# Altium PCB PCB1.PcbDoc
Units mil, origin at the board's own origin, x right, y up, seen from the top; angles counter-clockwise.
Board outline 2550 x 3100 mil, 2 copper layers (Top Layer, Bottom Layer), stack 167.2 mil thick; 31 components, 21 nets, 101 pads, 3 vias.
Unrouted connection lines stored in the file: 2.
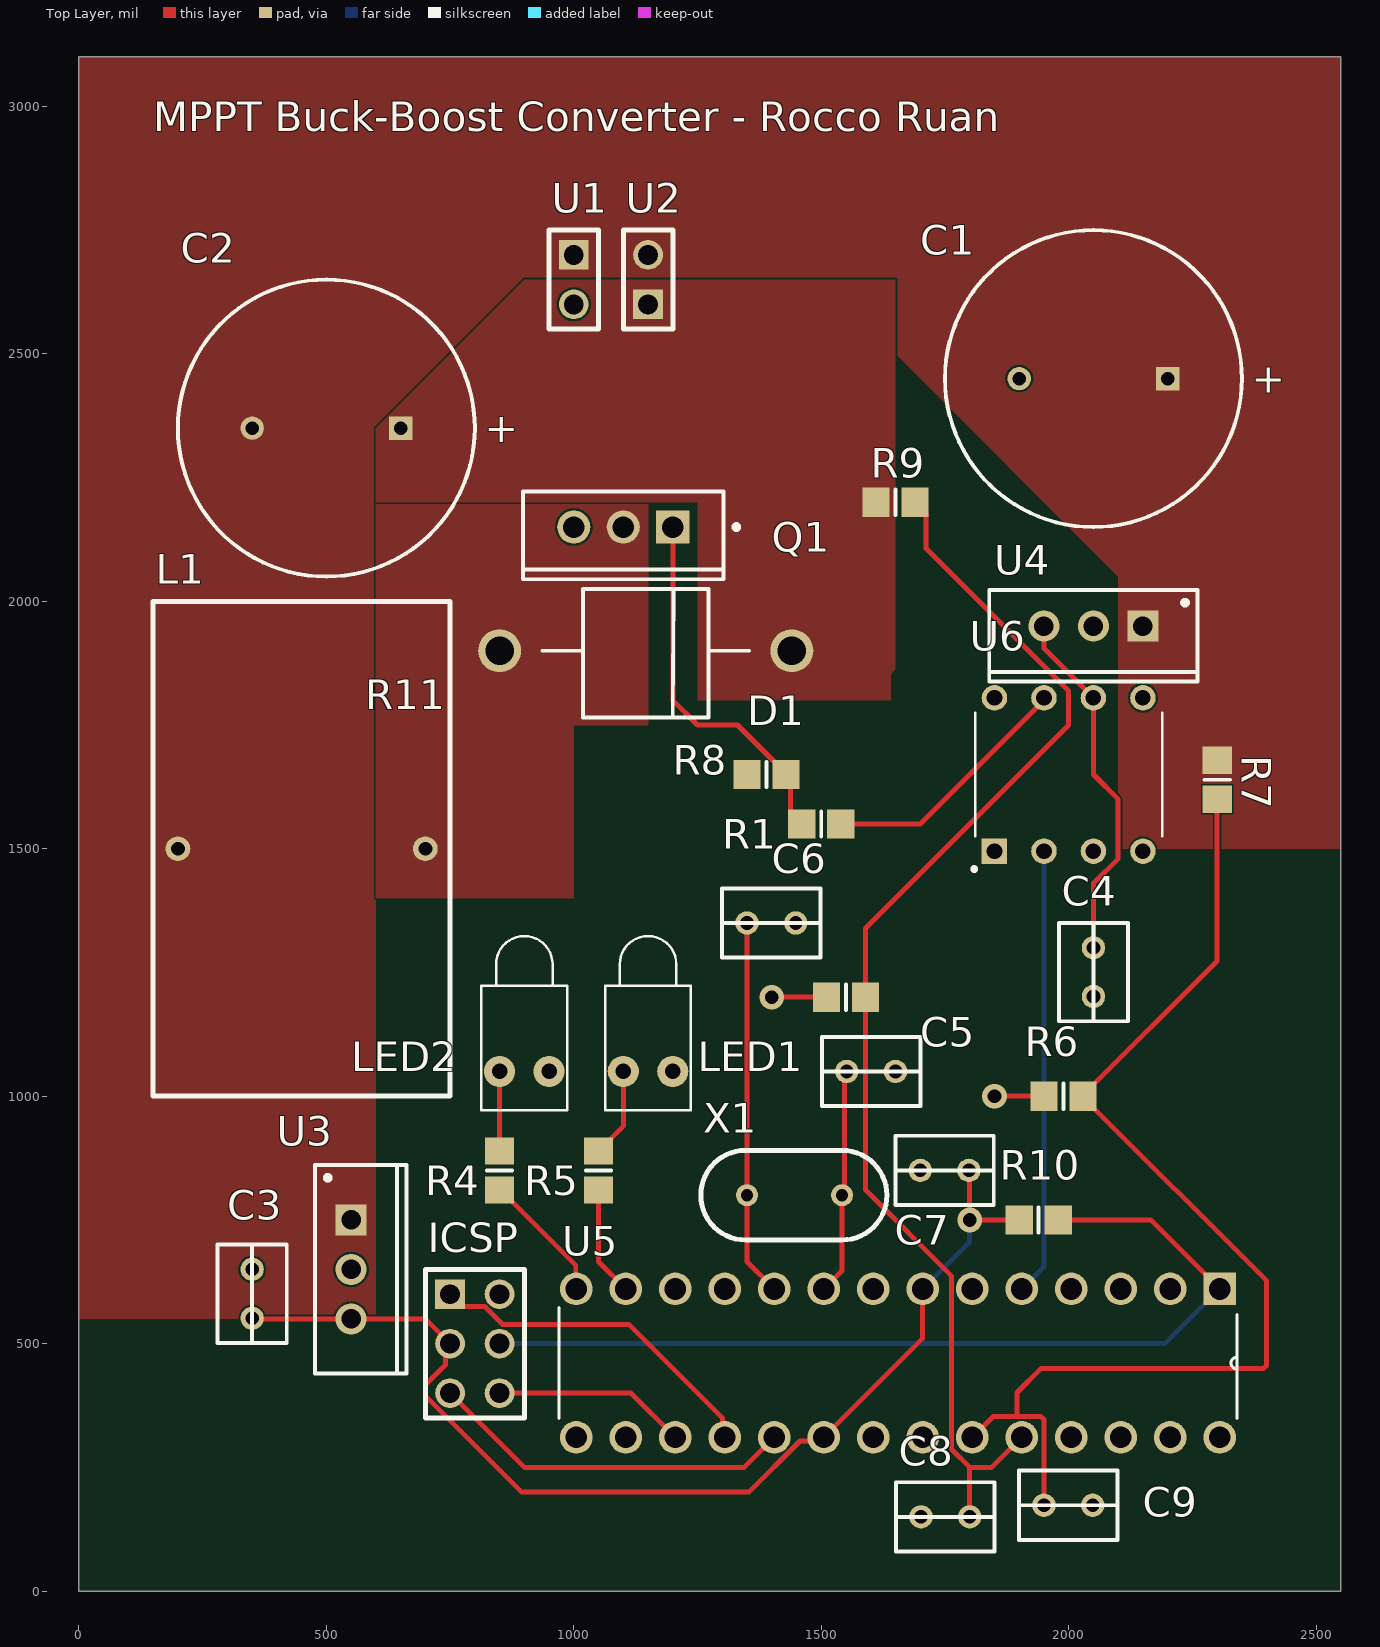
[diagram p0: Top Layer view]
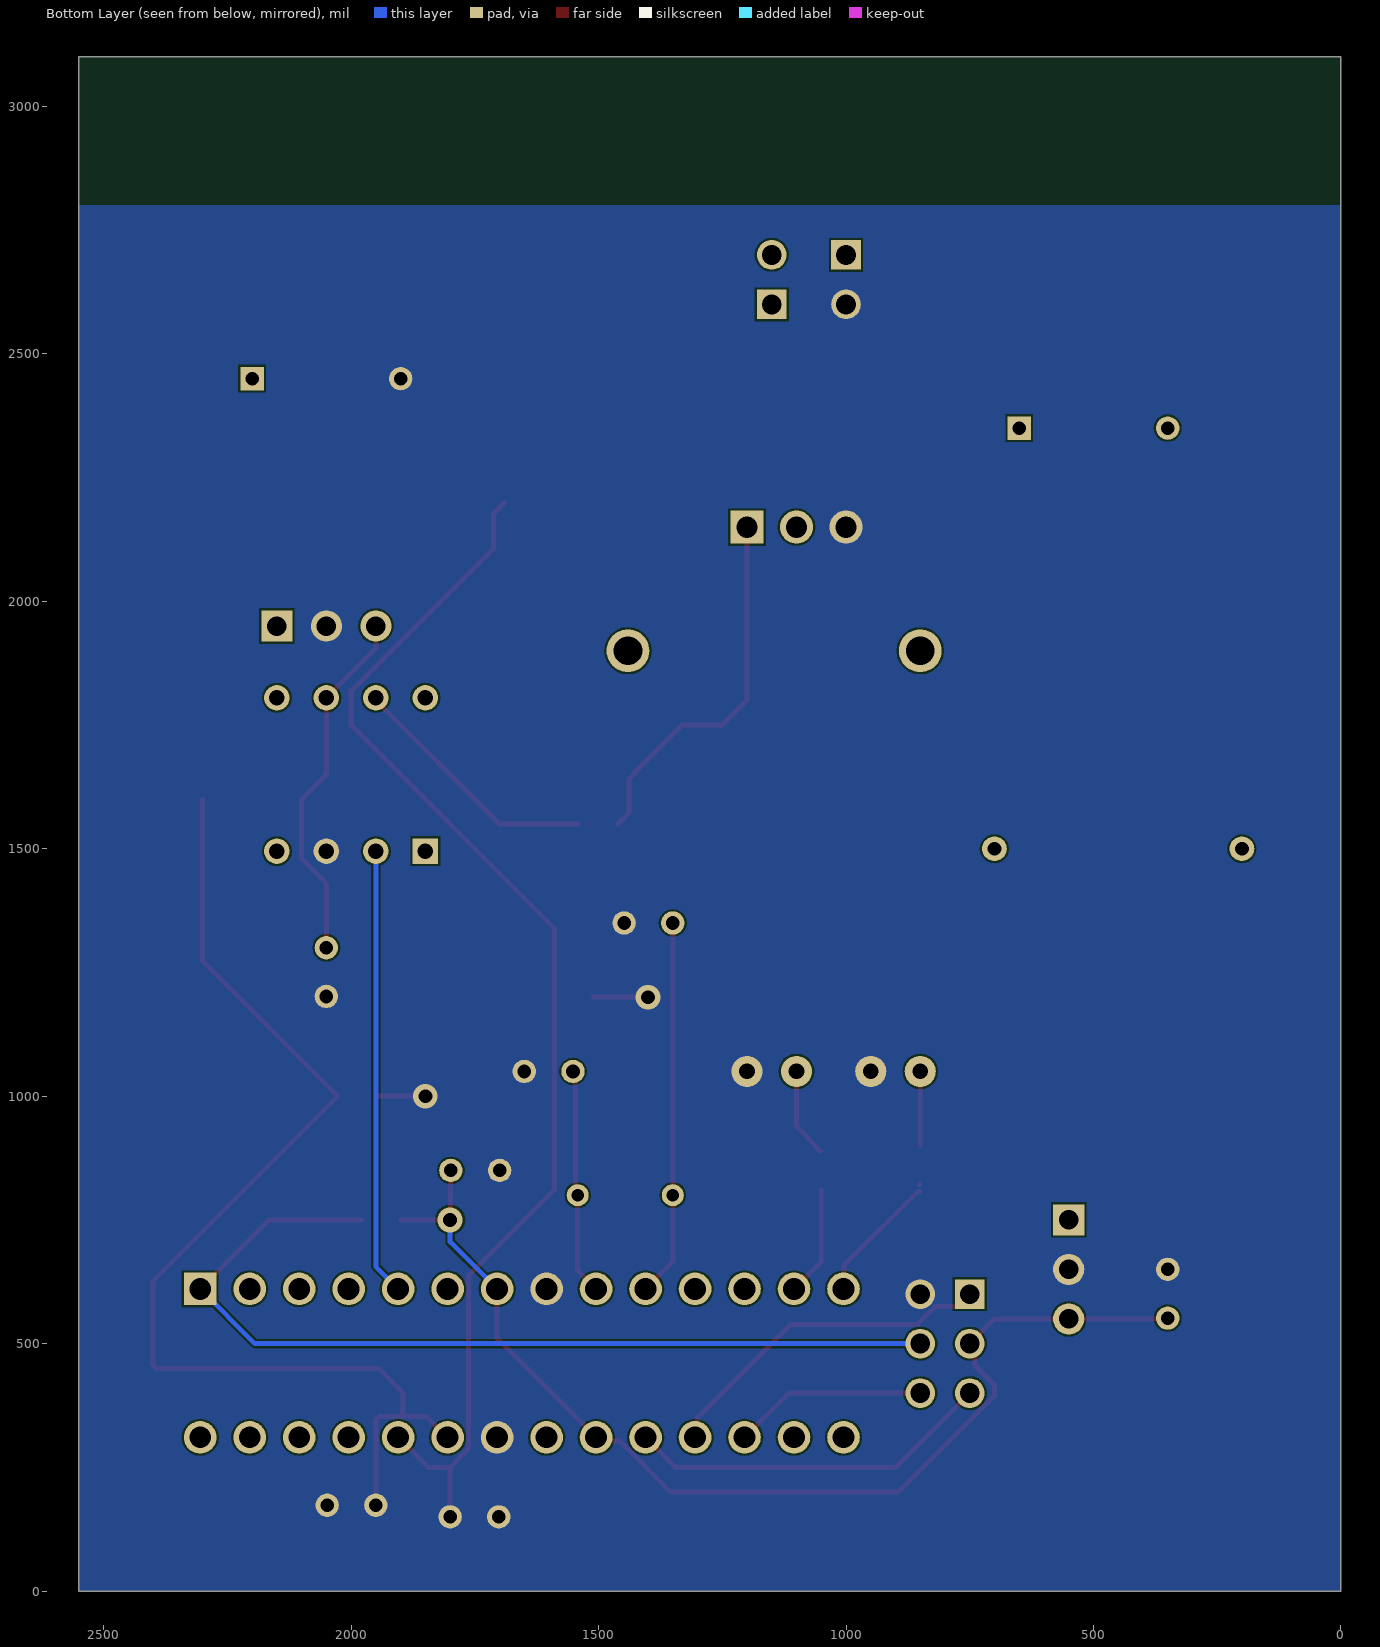
[diagram p1: Bottom Layer view, seen from below]

## Layer stack, top to bottom
Top Solder: solder mask 0.4, Solder Resist, Dk 3.5
Top Layer: signal copper 1.4
Dielectric 1: dielectric 164.4, FR-4, Dk 4.8
Bottom Layer: signal copper 1.4
Bottom Solder: solder mask 0.4, Solder Resist, Dk 3.5

## Board outline
0,0 2550,0 2550,3100 0,3100

## Design rules (kind name [scope] priority, off if disabled: settings)
Clearance [All] p1: gap=4 ignorepadtopadclearanceinfootprint=FALSE except(0: Arc-Hole Track-Hole SMDPad-Hole THPad-Hole Via-Hole Fill-Hole Poly-Hole Region-Hole Text-Hole; 5: Arc-Via Track-Via SMDPad-Via THPad-Via Via-Via Via-Fill Via-Poly Via-Region Via-Text)
HoleSize [All] p1: absolutevalues=TRUE maxlimit=100 minlimit=12 maxpercent=80.000 minpercent=20.000
PlaneConnect [All] p1: planeconnectstyle=Direct reliefexpansion=20 reliefentries=4 reliefconductorwidth=10 reliefairgap=10
PolygonConnect [All] p1: connectstyle=Direct reliefconductorwidth=10 reliefentries=4 polygonreliefangle="90 Angle" airgapwidth=10
RoomDefinition Sheet1 [InComponentClass('Sheet1')] p1: confinementstyle=ConfineIn formatcopy=TRUE lockcomponents=FALSE outline 0,0 2550,0 2550,2800 0,2800
RoutingVias [All] p1: holewidth=28 width=50 viastyle="Through Hole" minholewidth=12 minwidth=18 maxholewidth=28 maxwidth=50
SilkToSilkClearance [All] p1: silktosilkclearance=0
SilkToSolderMaskClearance [IsPad] p1: minsilkscreentomaskgap=0 clearancetoexposedcopper=TRUE
SolderMaskExpansion [All] p1: expansion=4
Width [All] p1: maxlimit=10 minlimit=4 preferedwidth=10
26 further rules are at their usual default settings.

## Components (designator, comment, footprint, x,y, rotation, side; value= is the part's Value field where it differs from the comment)
C1 "Cap Pol1" RB7.6-15 2050,2450 r0 top value=470uF
C2 "Cap Pol1" RB7.6-15 500,2350 r0 top value=470uF
C3 "Cap" "Ceramic Capacitor" 350,650 r270 top value=10uF
C4 "Cap" "Ceramic Capacitor" 2050,1201.57 r90 top value=10uF
C5 "Cap" "Ceramic Capacitor" 1650,1050 r180 top value=7pF
C6 "Cap" "Ceramic Capacitor" 1448.43,1350 r180 top value=7pF
C7 "Cap" "Ceramic Capacitor" 1700,850 r0 top value=0.1uF
C8 "Cap" "Ceramic Capacitor" 1701.57,150 r0 top value=0.1uF
C9 "Cap" "Ceramic Capacitor" 2048.43,173.48 r180 top value=0.1uF
D1 "10A10" Diode 850,1900 r0 top
ICSP "ISCPHeader3x2" "3x2 Header" 750,600 r270 top
L1 "Inductor" "Toroidal Inductor" 450,1500 r180 top value=1mH
LED1 "LED-3MM" LED-1 1150,1050 r90 top
LED2 "LED-3MM" LED-1 900,1050 r90 top
Q1 "IRF3710" NXP-SOT226 1100,2150 r270 top
R1 "Res1" 6-0805_M 1500,1550 r180 top value=10k
R4 "Res1" 6-0805_M 850,850 r270 top value=1K
R5 "Res1" 6-0805_M 1050,850 r270 top value=1K
R6 "Res1" 6-0805_M 1989.37,1000 r0 top value=5k
R7 "Res1" 6-0805_M 2300,1639.37 r90 top value=95K
R8 "Res1" 6-0805_M 1550,1200 r0 top value=5k
R9 "Res1" 6-0805_M 1650,2200 r180 top value=95K
R10 "Res1" 6-0805_M 1939.37,750 r180 top value=1K
R11 "100k" 6-0805_M 1389.37,1650 r180 top value=1K
U1 "KF1000-2P" "2x1 HEADER" 1000,2650 r270 top
U2 "KF1000-2P" "2x1 HEADER" 1150,2650 r90 top
U3 "L7805CV-DG" TO-220AB 550,650 r270 top
U4 "L7812CV-DG" TO-220AB 2050,1950 r180 top
U5 "ATMEGA328P-PU" *DIP254P762X457-28 1005,310.63 r270 top
U6 "TC427CPA" *DIP787W46P254L927H533Q8 2000,1650 r90 top
X1 "XTAL" Oscillator 1542.13,800 r180 top

## Footprints (in the part's own frame and the unit in brackets; to place one, negate y for a bottom-side part, rotate by r counter-clockwise, add the part's x,y. Pads: shape width x height; smd on the part's side, far side on the other; paste and mask are expansions set on the pad)
"2x1 HEADER" [mil]
  rect 60x60 hole 40: 1(-50,0)
  round 60 hole 40: 2(50,0)
  silkscreen extent -100,-50 100,50
"3x2 Header" [mil]
  rect 60x60 hole 40: 1(0,0)
  round 60 hole 40: 2(100,0) 3(200,0) 4(200,100) 5(100,100) 6(0,100)
  silkscreen extent -50,-50 250,150
6-0805_M [mm] "Chip Resistor, Body 2.0x1.2mm, IPC Low Density"
  rect 1.4x1.5 smd: 1(-1,0) 2(1,0)
  silkscreen extent 0,-0.65 0,0.65, body extent -1.07,-0.7 1.07,0.7, height 0.7
*DIP254P762X457-28 [mil]
  rect 66x66 hole 44: 1(-300,1300)
  round 66 hole 44: 2(-300,1200) 3(-300,1100) 4(-300,1000) 5(-300,900) 6(-300,800) 7(-300,700) 8(-300,600) 9(-300,500) 10(-300,400) 11(-300,300) 12(-300,200) 13(-300,100) 14(-300,0) 15(0,0) 16(0,100) 17(0,200) 18(0,300) 19(0,400) 20(0,500) 21(0,600) 22(0,700) 23(0,800) 24(0,900) 25(0,1000) 26(0,1100) 27(0,1200) 28(0,1300)
  silkscreen extent -262,-35 -38,1335
*DIP787W46P254L927H533Q8 [mm]
  rect 1.308x1.308 hole 0.8: 1(-3.935,3.81)
  round 1.308 hole 0.8: 2(-3.935,1.27) 3(-3.935,-1.27) 4(-3.935,-3.81) 5(3.935,-3.81) 6(3.935,-1.27) 7(3.935,1.27) 8(3.935,3.81)
  silkscreen extent -4.95,-4.8 3.18,4.95
"Ceramic Capacitor" [mm]
  round 1.2 hole 0.7: 1(0,0) 2(2.5,0)
  silkscreen extent -1.27,-1.78 3.77,1.78
Diode [mm]
  round 2.2 hole 1.47: 1(0,0) 2(15,0)
  silkscreen extent 2.2,-3.43 12.8,3.17
LED-1 [mm] "LED; 2 Leads"
  round 1.6 hole 0.8: 1(0,1.27) 2(0,-1.27)
  silkscreen extent -2,-2.2 6.95,2.2
NXP-SOT226 [mm] "FM, 3-Leads, Body 10.3x4.5mm, Pitch 2.54mm"
  rect 1.7x1.7 hole 1.1: 1(0,2.54)
  round 1.7 hole 1.1: 2(0,0) 3(0,-2.54)
  silkscreen extent -1.82,-5.15 2.68,5.93, body extent -1.82,-5.15 2.68,5.15, height 14.3
Oscillator [mm]
  round 1.13 hole 0.63: 1(0,0) 2(4.88,0)
  silkscreen extent -2.3,-2.3 7.25,2.3
RB7.6-15 [mm] "Polarized Capacitor (Radial); 2 Leads"
  rect 1.2x1.2 hole 0.7: 1(3.81,0)
  round 1.2 hole 0.7: 2(-3.81,0)
  silkscreen extent -7.62,-7.62 7.62,7.62
TO-220AB [mm] "TO, Thru-Hole, Vertical, Heatsink Mounted; 3 In-Line Leads; Pitch 2.54 mm"
  rect 1.6x1.6 hole 1: 1(-2.54,0)
  round 1.6 hole 1: 2(0,0) 3(2.54,0)
  silkscreen extent -5.35,-1.85 5.35,2.85, body extent -5.4,-1.9 5.4,2.9, height 19.3
"Toroidal Inductor" [mil]
  round 50 hole 28: 1(-250,0) 2(250,0)
  silkscreen extent -300,-500 300,500

## Part data
C1 C2: "Polarized Capacitor (Radial)", LatestRevisionDate=17-Jul-2002, LatestRevisionNote="Re-released for DXP Platform.", PackageDescription="Polarized Capacitor (Radial); 2 Leads", PackageReference=RB7.6-15, Published=8-Jun-2000, Publisher="Altium Limited"
C3 C4 C5 C6 C7 C8 C9: "Capacitor", LatestRevisionDate=17-Jul-2002, LatestRevisionNote="Re-released for DXP Platform.", PackageDescription="Radial Cap, Thru-Hole; 2 Leads; 0.3 in Pin Spacing", PackageReference=RAD-0.3, Published=8-Jun-2000, Publisher="Altium Limited"
D1: library part Diode, "Default Diode", Code_JEDEC=DO-214-AB, LatestRevisionDate=17-Jul-2002, LatestRevisionNote="Re-released for DXP Platform.", PackageDescription="DO-214-AB/SMC; 2 C-Bend Leads; Body 7.9 x 5.9 mm, inc. leads (LxW)", PackageReference=SMC, PackageVersion=Sep-1996, Published=8-Jun-2000, Publisher="Altium Limited"
LED1 LED2: library part LED1, "Typical RED GaAs LED", LatestRevisionDate=08-Jul-2005, LatestRevisionNote="Mech Layer 1 removed.", PackageDescription="LED; 2 Leads", PackageReference=LED-1, Published=8-Jun-2000, Publisher="Altium Limited"
Q1: library part CMP-1259-00071-1, "N-Channel TrenchMOS Logic Level FET, 40 V, 3-Pin SOT226, Rail", Manufacturer="NXP Semiconductors", PartNumber=BUK9E4R4-40B,127, Automotive Qualified=Y, Channel Type=N, Code_JEDEC=TO-262, ComponentLink1Description="Manufacturer URL", ComponentLink1URL=http://www.nxp.com/, ComponentLink2Description=Datasheet, ComponentLink2URL=http://www.nxp.com/documents/data_sheet/BUK9E4R4-40B.pdf, ComponentLink3Description="Package Specification", ComponentLink3URL=http://www.nxp.com/documents/outline_drawing/sot226_po.pdf, DatasheetVersion="Rev. 03", IDM [max] (A)=697, Mounting Technology="Through Hole", PackageDescription="3-Pin Flange Mount, Vertical Straight Lead, Body 10 x 4.3 mm, Pitch 2.54 mm", PackageReference=SOT226, PackageVersion="09-08-25, 08/2009", Packing=Rail, Qr [typ] (nC)=67, VDS [max] (V)=40, VGSth [typ] (V)=1.5
R1 R4 R5 R6 R7 R8 R9 R10: "Resistor", LatestRevisionDate=17-Jul-2002, LatestRevisionNote="Re-released for DXP Platform.", PackageDescription="Axial Device, Thru-Hole; 2 Leads; 0.3 in Pin Spacing", PackageReference=AXIAL-0.3, Published=8-Jun-2000, Publisher="Altium Limited"
R11: library part Res1, "Resistor", LatestRevisionDate=17-Jul-2002, LatestRevisionNote="Re-released for DXP Platform.", PackageDescription="Axial Device, Thru-Hole; 2 Leads; 0.3 in Pin Spacing", PackageReference=AXIAL-0.3, Published=8-Jun-2000, Publisher="Altium Limited"
U1 U2: library part Screw_Terminal
U3 U4: library part "Volt Reg", "Voltage Regulator", LatestRevisionDate=29-May-2009, LatestRevisionNote="IPC-7351 Footprint Added.", PackageDescription="3-Pin Transistor Outline Package 2.54 mm Pitch, 15.1 mm Lead Span", PackageReference=D2PAK, Published=24-Mar-1999, Publisher="Altium Limited"
U5: library part ATMEGA
X1: "Crystal Oscillator", LatestRevisionDate=17-Jul-2002, LatestRevisionNote="Re-released for DXP Platform.", PackageDescription="Crystal, Thru-Hole; 2 Leads; Body 3.1 x 8.2 mm (Dia.xH)", PackageReference=R38, Published=8-Jun-2000, Publisher="Altium Limited"
L1: Code_IEC=1005, Code_JEITA=0402, LatestRevisionDate=29-May-2009, LatestRevisionNote="IPC-7351 Footprint Added.", PackageDescription="Chip Inductor", PackageReference=0402-A, Published=8-Jun-2000, Publisher="Altium Limited"

## Via types
v1: diameter 50, hole 28, Top Layer to Bottom Layer, 3 vias

## Nets (pads, with @x,y where several pads share a name; then routed paths per layer and width w, separated by ;. In a path a pad name is that pad's centre, name@x,y a point inside that pad or via, vN(x,y) a via of type N, cw(c..) or ccw(c..) an arc to the next point about the centre after c; other vN are vias at no path point)
+5: C3.2 C7.2 ICSP.2 R10.2 U3.3 U5.7 U5.20 | length 2267.4
  Top Layer w10: C3.2 351.57,550 U3.3 700,550 ICSP.2 740.43,490.43 740.43,456.9 700,416.47 700,394.85 894.85,200 1353.77,200 1457,303.23 1497.6,303.23 U5.20 1705,510.63 U5.7 ; U3.3@533.06,530.32 U3.3@559.46,530.32 ; C7.2 1799.21,849.21 1799.21,750.79 v1(1800,750) R10.2
  Bottom Layer w10: U5.7 1800,705.63 v1(1800,750)
+12: C4.2 U4.3 U6.6 | length 732.8
  Top Layer w10: U4.3 1950,1904.92 U6.6 2050,1650 2100,1600 2100,1480.04 2050,1430.04 C4.2
GND: C1.2 C3.1 C4.1 C5.1 C6.1 C7.1 C8.1 C9.1 ICSP.6 LED1.2 LED2.2 Q1.3 R6.1 R8.1 R11.2 U1.2 U3.2 U4.2 U5.8 U5.22 U6.3 | length 210.6
  Top Layer w10: v1(1400,1200) R8.1 ; v1(1850,1000) R6.1
IN_A: U5.5 U6.2 | length 903.1
  Bottom Layer w10: U5.5 1950,655.63 U6.2
MISO: ICSP.1 U5.18 | length 695
  Top Layer w10: ICSP.1 775,575 819.85,575 855.85,539 1111,539 1300,350 1300,315.63 U5.18
MOSI: ICSP.4 U5.17 | length 392
  Top Layer w10: ICSP.4 1115.63,400 U5.17
NetC5_2: C5.2 U5.9 X1.1 | length 458.7
  Top Layer w10: U5.9 1542.13,647.76 X1.1 1546.85,804.72 1546.85,1045.28 C5.2
NetC6_2: C6.2 U5.10 X1.2 | length 762.2
  Top Layer w10: C6.2 X1.2 1350,665.63 U5.10
NetD1_1: D1.1 L1.1 Q1.2
NetLED1_1: LED1.1 R5.1 | length 182.5
  Top Layer w10: R5.1 1051.97,889.37 1074.53,911.93 1074.53,913.9 1100,939.37 LED1.1
NetLED2_1: LED2.1 R4.1 | length 150
  Top Layer w10: R4.1@850,900 LED2.1
NetQ1_1: Q1.1 R1.2 R11.1 | length 755.2
  Top Layer w10: Q1.1 1200,1800 1250,1750 1330.71,1750 1428.74,1651.97 R11.1 1438.07,1640.67 1438.07,1572.56 R1.2
NetR4_2: R4.2 U5.14 | length 264
  Top Layer w10: R4.2@850,807.26 855.34,807.26 1003.97,658.63 1003.97,611.66 U5.14
NetR5_2: R5.2 U5.13 | length 222.8
  Top Layer w10: R5.2 1050,665.63 U5.13
OUT_A: R1.1 U6.7 | length 519.1
  Top Layer w10: R1.1 1700,1550 1950,1800 U6.7
RESET: ICSP.5 R10.1 U5.1 | length 1884.8
  Top Layer w10: R10.1 2165.63,750 U5.1
  Bottom Layer w10: ICSP.5 2194.37,500 U5.1
SCK: ICSP.3 U5.19 | length 742.2
  Top Layer w10: ICSP.3 900,250 1344.37,250 U5.19
VIN: C1.1 C2.2 L1.2 R7.2 U1.1 U2.2 U3.1 U4.1
VIN_ADC: C9.2 R6.2 R7.1 U5.23 | length 2324
  Top Layer w10: U5.23 1847,352.63 1895.57,352.63 ; C9.2 1950,346.77 1944.14,352.63 1895.57,352.63 ; R7.1 2300,1273.23 2028.74,1001.97 R6.2 2028.74,998.03 2400,626.77 2400,455.86 2394.14,450 1944.37,450 1895.57,401.2 1895.57,352.63
VOUT: C2.1 D1.2 R9.2 U2.1
VOUT_ADC: C8.2 R8.2 R9.1 U5.24 | length 2566.1
  Top Layer w10: R9.1 1711.93,2177.44 1711.93,2106.77 2000,1818.7 2000,1750 1589.37,1339.37 R8.2 1589.37,810.63 1763,637 1763,287 1800,250 ; C8.2 1800,250 ; U5.24 1844.37,250 1800,250
pads on no net: U5.2 U5.3 U5.4 U5.6 U5.11 U5.12 U5.15 U5.16 U5.21 U5.25 U5.26 U5.27 U5.28 U6.1 U6.4 U6.5 U6.8
copper on no net: | length 2
  Top Layer w10: 850,821.26 851.97,821.26

## Polygon pours and split planes (outlines as drawn)
VOUT on Top Layer "Top Layer-VOUT" (solid, pour order 54): 900,2650 600,2350 600,2200 1250,2200 1250,1800 1650,1800 1650,2650
NetD1_1 on Top Layer "Top Layer-NetD1_1" (solid, pour order 56): 1150,2200 600,2200 600,1400 1000,1400 1000,1750 1150,1750
VIN on Top Layer "Top Layer-VIN" (solid, pour order 58): 600,550 0,550 0,3100 2550,3100 2550,1500 2100,1500 2100,2050 1650,2500 750,2500 600,2350
no net on Top Layer "Top Layer-No Net" (solid, pour order 52): 650,550
no net on Top Layer "Top Layer-No Net 1" (solid, pour order 44): 600,1500
no net on Top Layer "Top Layer-No Net 2" (solid, pour order 40): 550,1500
no net on Top Layer "Top Layer-No Net 3" (solid, pour order 38): 650,1350
no net on Top Layer "Top Layer-No Net 4" (solid, pour order 34): 650,2400
GND on Bottom Layer "Bottom Layer-GND" (solid, pour order 26): 0,2800 0,0 2550,0 2550,2800

## Silkscreen, mask and mechanical layers (free items; w line width, h text height)
Top Overlay:
  text "MPPT Buck-Boost Converter - Rocco Ruan" at 150,2950 h60

## Text inside footprints (layer, text, board x,y; h text height)
C1: Top Overlay "+" at 2370.15,2420.99 h59.06
C2: Top Overlay "+" at 820.15,2320.99 h59.06